# Altium PCB 0.96OLED_SSD1306.PcbDoc
Units mm, origin at the board's own origin, x right, y up, seen from the top; angles counter-clockwise.
Board outline 27 x 28 mm, 2 copper layers (Top Layer, Bottom Layer); 18 components, 15 nets, 67 pads, 13 vias.
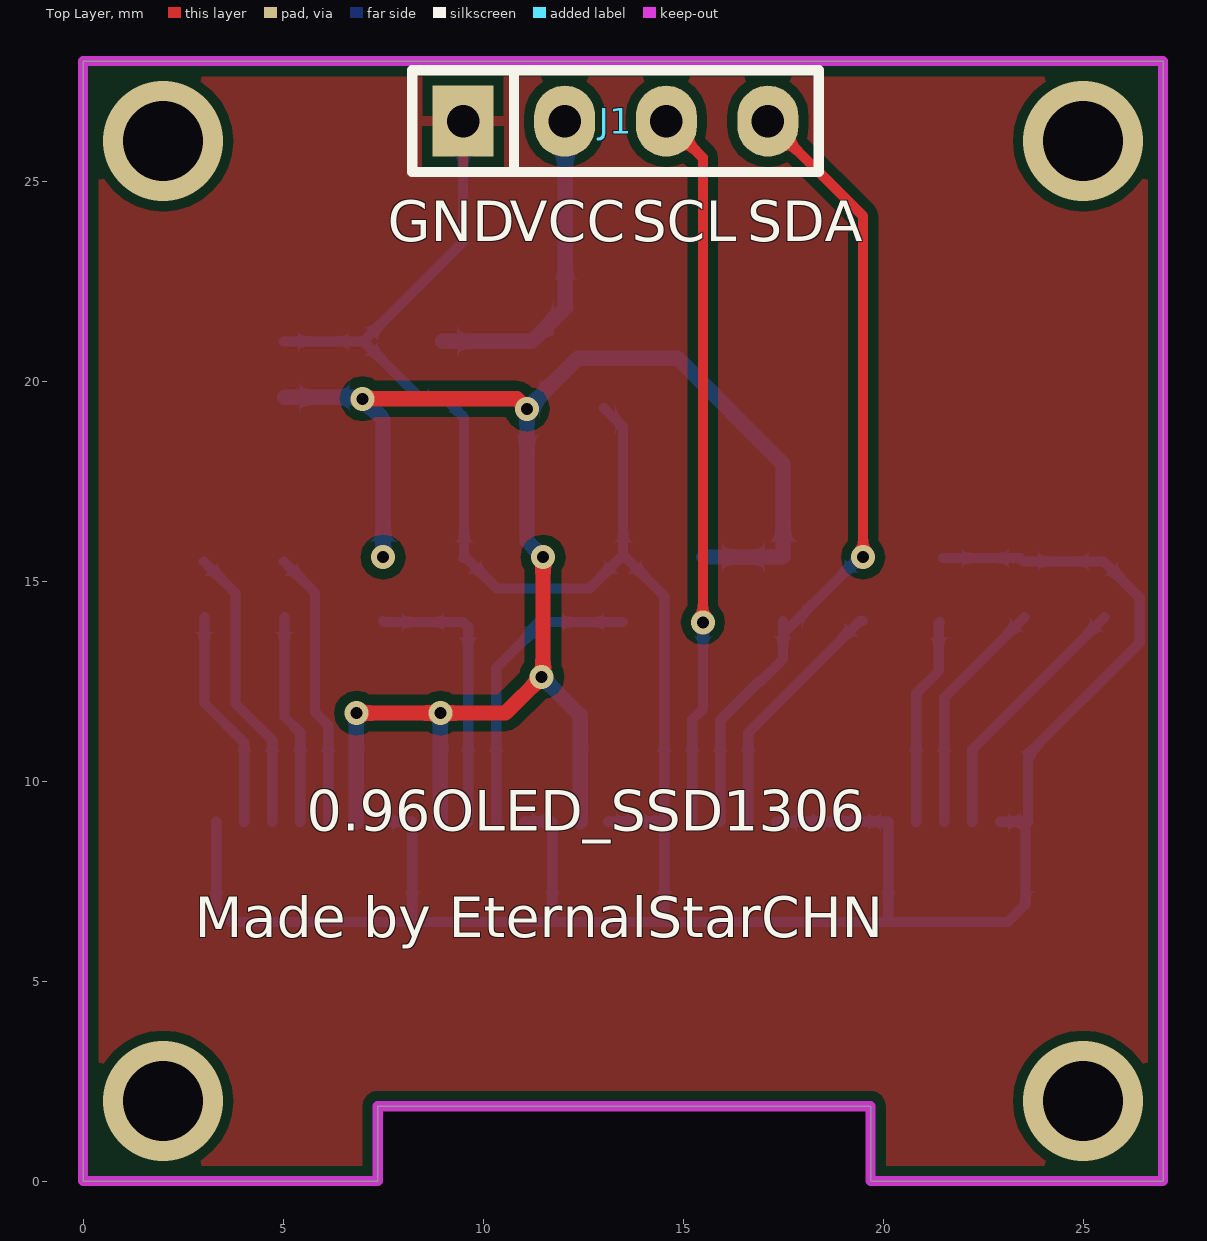
[diagram p0: Top Layer view]
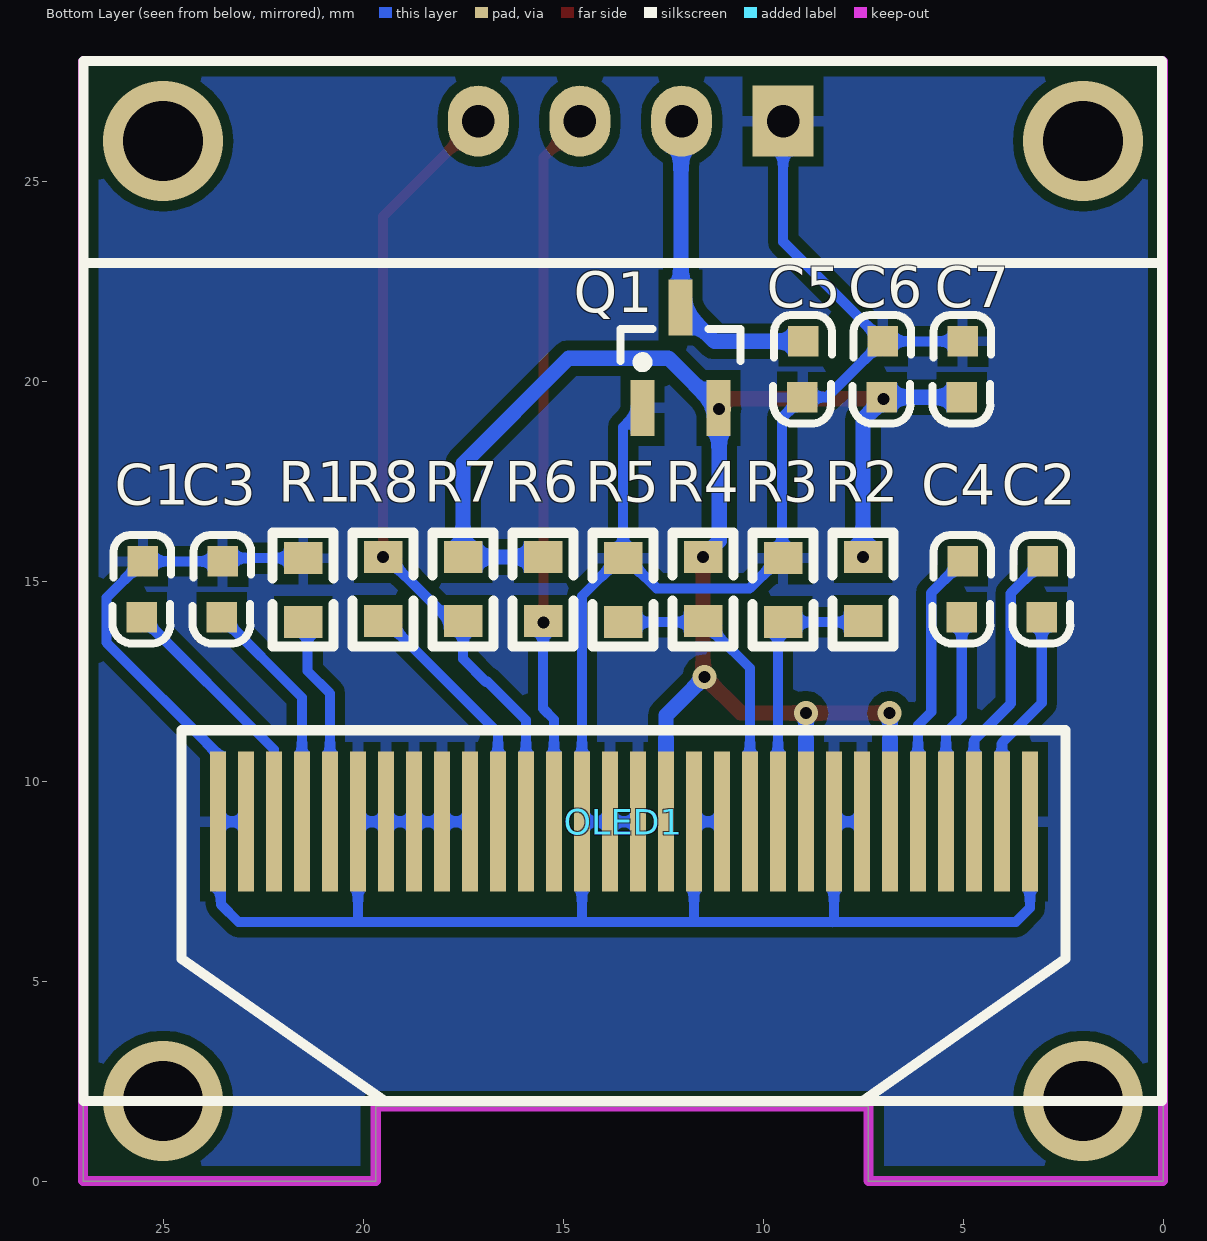
[diagram p1: Bottom Layer view, seen from below]
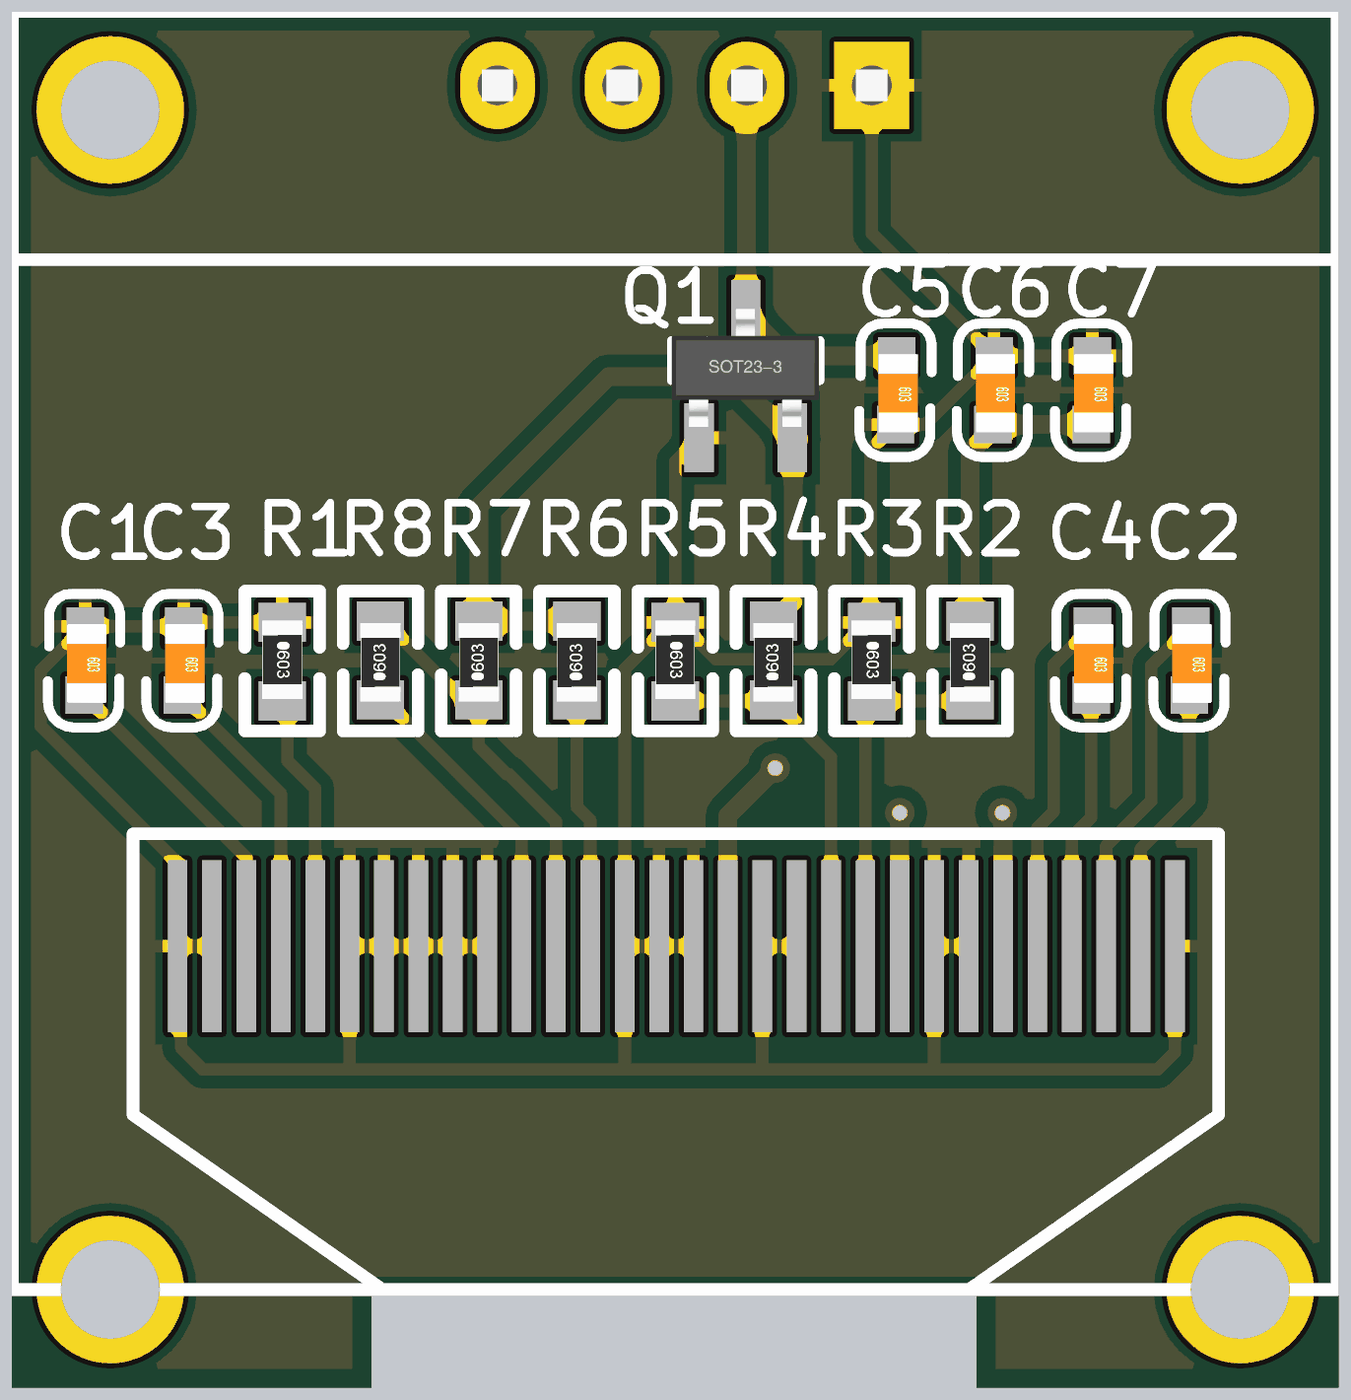
[diagram p2: 3D render of the assembled board from below, using the file's embedded part models]

## Layer stack, top to bottom
Top Solder: solder mask 0.0102, Solder Resist, Dk 3.5
Top Layer: signal copper 0.0356
Dielectric 1: dielectric 0.32, FR-4, Dk 4.8
Bottom Layer: signal copper 0.0356
Bottom Solder: solder mask 0.0102, Solder Resist, Dk 3.5

## Board outline
0,0 0,28 27,28 27,0 19.685,0 19.685,1.873 7.366,1.873 7.366,0

## Design rules (kind name [scope] priority, off if disabled: settings)
Clearance [All] p1: gap=0.254 ignorepadtopadclearanceinfootprint=FALSE except(0: Arc-Hole Track-Hole SMDPad-Hole THPad-Hole Via-Hole Fill-Hole Poly-Hole Region-Hole Text-Hole)
ComponentClearance ComponentClearance_1 [InComponent('OLED1')] p1: gap=0 collisioncheckmode=3 verticalgap=0 showdistances=FALSE
ComponentClearance [All] p2: gap=0.254 collisioncheckmode=3 verticalgap=0.254 showdistances=FALSE
MinimumSolderMaskSliver [All] p1: minsoldermaskwidth=0
PolygonConnect [All] p1: connectstyle=Relief reliefconductorwidth=0.254 reliefentries=4 polygonreliefangle="90 Angle" airgapwidth=0.254
RoutingVias [All] p1: holewidth=0.711 width=1.27 viastyle="Through Hole" minholewidth=0.3 minwidth=0.6 maxholewidth=6.3 maxwidth=6.3
SilkToSilkClearance [All] p1: silktosilkclearance=0
SilkToSolderMaskClearance [IsPad] p1: minsilkscreentomaskgap=0 clearancetoexposedcopper=TRUE
SolderMaskExpansion [All] p1: expansion=0.102
Width [All] p1: maxlimit=0.508 minlimit=0.127 preferedwidth=0.254
26 further rules are at their usual default settings.

## Components (designator, comment, footprint, x,y, rotation, side; value= is the part's Value field where it differs from the comment)
C1 "2.2uF/0603" 0603C 25.5,15.5 r270 bottom
C2 "1uF/0603" 0603C 3,15.5 r270 bottom
C3 "4.7uF/0603" 0603C 23.5,15.5 r270 bottom
C4 "1uF/0603" 0603C 5,15.5 r270 bottom
C5 "1uF/0603" 0603C 8.983,21 r270 bottom
C6 "1uF/0603" 0603C 7,21 r270 bottom
C7 "1uF/0603" 0603C 5,21 r270 bottom
J1 "Pin HDR1X4" "Pin HDR1X4/2.54mm-S" 9.5,26.5 r90 top
OLED1 "0.96OLED_SSD1306" OLED_0.96 3.329,8.985 r0 bottom locked
Q1 "662K/SOT23" SOT23 13.015,19.33 r180 bottom
R1 "910K/0603" 0603R 21.5,15.575 r270 bottom
R2 "1K/0603" 0603R 7.5,14 r90 bottom
R3 "1K/0603" 0603R 9.5,15.575 r270 bottom
R4 "1K/0603" 0603R 11.5,14 r90 bottom
R5 "1K/0603" 0603R 13.5,15.575 r270 bottom
R6 "4.7K/0603" 0603R 15.5,14 r90 bottom
R7 "4.7K/0603" 0603R 17.5,14 r90 bottom
R8 "0R/0603" 0603R 19.5,14 r90 bottom

## Footprints (in the part's own frame and the unit in brackets; to place one, negate y for a bottom-side part, rotate by r counter-clockwise, add the part's x,y. Pads: shape width x height; smd on the part's side, far side on the other; paste and mask are expansions set on the pad)
0603C [mil]
  rect 30x30 smd: 1(0.21,-0.35) 2(55.21,-1.35)
  silkscreen extent -26,-30 81,28, body extent -1,-15 62,16, height 12
0603R [mm]
  rect 0.8x0.965 smd: 1(0,0) 2(1.6,0)
  silkscreen extent -0.64,-0.76 2.21,0.76, body extent -0.04,-0.41 1.56,0.41, height 0.45
OLED_0.96 [mm]
  rect 0.4x3.5 smd: 1(0,0) 2(0.7,0) 3(1.4,0) 4(2.1,0) 5(2.8,0) 6(3.5,0) 7(4.2,0) 8(4.9,0) 9(5.6,0) 10(6.3,0) 11(7,0) 12(7.7,0) 13(8.4,0) 14(9.1,0) 15(9.8,0) 16(10.5,0) 17(11.2,0) 18(11.9,0) 19(12.6,0) 20(13.3,0) 21(14,0) 22(14.7,0) 23(15.4,0) 24(16.1,0) 25(16.8,0) 26(17.5,0) 27(18.2,0) 28(18.9,0) 29(19.6,0) 30(20.3,0)
  silkscreen extent -3.3,-19.01 23.66,6.98
"Pin HDR1X4/2.54mm-S" [mil]
  rect 70x60 hole 32: 1(0,0)
  oval 70x60 hole 32: 2(0,-100) 3(0,-200) 4(0,-300)
  silkscreen extent -50,-350 50,50, body extent -50,-350 50,50, height 336
SOT23 [mm]
  rect 0.6x1.4 smd: 1(0,0) 2(1.9,0) 3(0.95,2.514)
  silkscreen extent -0.55,1.02 2.45,1.97, body extent -0.56,0.22 2.44,2.62, height 1.05

## Part data
C1 C2 C3 C4 C5 C6 C7: library part CAP, "无极性电容"
Q1: library part LDO_SOT23, "SOT23封装LDO"
R1 R2 R3 R4 R5 R6 R7 R8: library part RES

## Via types
v1: diameter 0.6, hole 0.3, Top Layer to Bottom Layer, 9 vias
v2: diameter 3, hole 2, Top Layer to Bottom Layer, 4 vias

## Nets (pads, with @x,y where several pads share a name; then routed paths per layer and width w, separated by ;. In a path a pad name is that pad's centre, name@x,y a point inside that pad or via, vN(x,y) a via of type N, cw(c..) or ccw(c..) an arc to the next point about the centre after c; other vN are vias at no path point)
GND: C1.1 C3.1 C5.2 C6.1 C7.1 J1.1 OLED1.1 OLED1.7 OLED1.8 OLED1.12 OLED1.13 OLED1.15 OLED1.16 OLED1.17 OLED1.21 OLED1.22 OLED1.23 OLED1.24 OLED1.25 OLED1.29 OLED1.30 Q1.1 R1.1 R3.1 R5.1 | length 84.3
  Bottom Layer w0.254: OLED1.1 3.329,6.831 3.683,6.477 8.255,6.477 ; C7.1 C6.1 ; OLED1.7 OLED1.8 8.229,6.503 8.255,6.477 ; J1.1 9.5,23.486 C6.1 ; OLED1.12 OLED1.13 11.729,6.522 11.684,6.477 ; Q1.1 13.5,18.845 R5.1 ; OLED1.15 OLED1.16 OLED1.17 ; OLED1.21 OLED1.22 OLED1.23 OLED1.24 OLED1.25 20.129,6.54 20.066,6.477 ; R1.1 23.429,15.575 C3.1 C1.1 26.416,14.588 26.416,13.462 23.622,10.668 23.622,8.992 OLED1.30 ; OLED1.29 OLED1.30 ; C6.1 8.406,19.598 C5.2 9.525,19.09 9.525,15.6 R3.1 9.582,15.575 10.338,14.819 12.662,14.819 13.418,15.575 R5.1 ; 8.255,6.477 11.684,6.477 ; 11.684,6.477 14.605,6.477 ; R5.1 13.583,15.575 14.529,14.629 OLED1.17 ; OLED1.17 14.529,6.553 14.605,6.477 ; 14.605,6.477 20.066,6.477 ; 20.066,6.477 23.114,6.477 23.556,6.919 23.556,8.912 OLED1.30
NetC1_2: C1.2 OLED1.28 | length 6.5
  Bottom Layer w0.254: OLED1.28 22.229,10.792 C1.2
NetC2_1: C2.1 OLED1.3 | length 7.2
  Bottom Layer w0.254: C2.1 3.81,14.694 3.81,11.938 4.729,11.019 OLED1.3
NetC2_2: C2.2 OLED1.2 | length 5.5
  Bottom Layer w0.254: C2.2 3.034,11.952 4.029,10.957 OLED1.2
NetC3_2: C3.2 OLED1.27 | length 5.9
  Bottom Layer w0.254: OLED1.27 21.529,12.092 C3.2
NetC4_1: C4.1 OLED1.5 | length 7
  Bottom Layer w0.254: C4.1 5.796,14.707 5.796,11.73 6.129,11.397 OLED1.5
NetC4_2: C4.2 OLED1.4 | length 5.3
  Bottom Layer w0.254: C4.2 5.034,11.603 5.429,11.208 OLED1.4
NetOLED1_10: OLED1.10 R2.1 R3.2 | length 7.1
  Bottom Layer w0.254: R2.1 7.525,13.975 R3.2 9.629,13.846 OLED1.10
NetOLED1_11: OLED1.11 R4.1 R5.2 | length 7.6
  Bottom Layer w0.254: OLED1.11 10.329,12.829 11.145,13.645 11.145,13.727 11.418,14 R4.1 11.525,13.975 R5.2
NetOLED1_20: OLED1.20 R8.1 | length 6.3
  Bottom Layer w0.254: OLED1.20 16.629,11.212 19.417,14 R8.1
NetOLED1_26: OLED1.26 R1.2 | length 5.2
  Bottom Layer w0.254: OLED1.26 20.829,12.193 21.39,12.754 21.39,13.948 R1.2@21.418,13.975
SCL(D0): J1.3 OLED1.18 R6.1 | length 18
  Top Layer w0.254: J1.3 15.494,25.586 v1(15.494,13.97)
  Bottom Layer w0.254: OLED1.18 15.229,11.542 15.5,11.813 R6.1
SDA(D1): J1.4 OLED1.19 R7.1 R8.2 | length 20.4
  Top Layer w0.254: J1.4 19.5,24.12 v1(19.5,15.6)
  Bottom Layer w0.254: OLED1.19 15.929,11.523 16.891,12.485 16.93,12.485 17.5,13.055 R7.1@17.5,13.683 ; R7.1 R7.1@17.5,13.683 ; v1(19.5,15.6) 19.459,15.6 19.438,15.621 R7.1@17.5,13.683
VCC: C6.2 C7.2 OLED1.6 OLED1.9 OLED1.14 Q1.2 R2.2 R4.2 R6.2 R7.2 | length 44
  Top Layer w0.381: v1(6.84,11.7) v1(8.929,11.7) 10.557,11.7 v1(11.465,12.608) 11.5,12.643 v1(11.5,15.6) ; v1(6.985,19.558) 10.845,19.558 v1(11.099,19.304)
  Bottom Layer w0.254: v1(6.84,11.7) v1@6.84,11.702
  Bottom Layer w0.381: C7.2 C6.2 ; OLED1.6 v1@6.829,11.7 ; v1(6.985,19.558) 7.5,19.043 v1(7.5,15.6) ; OLED1.9 v1@8.929,11.645 ; v1(11.465,12.608) 12.429,11.644 OLED1.14 ; v1(11.5,15.6) 11.099,16.001 v1(11.099,19.304) 12.369,20.574 14.859,20.574 17.5,17.933 R7.2 R6.2@15.515,15.6
VCC_IN: C5.1 J1.2 Q1.3 | length 8.1
  Bottom Layer w0.381: C5.1 11.216,20.995 Q1.3 12.053,21.856 12.053,26.487 J1.2
copper on no net:
  other v2: 2,2 25,2 2,26 25,26

## Polygon pours and split planes (outlines as drawn)
GND on Top Layer "Top Layer-No Net" (solid, pour order 0): 0,0 0,28 27,28 27,0 19.685,0 19.685,1.873 7.366,1.873 7.366,0
GND on Bottom Layer "Top Layer-No Net1" (solid, pour order 1): 0,0 0,28 27,28 27,0 19.685,0 19.685,1.873 7.366,1.873 7.366,0

## Keep-outs
Keep-Out Layer:
  the board outline again, w0.254

## Silkscreen, mask and mechanical layers (free items; w line width, h text height)
Top Overlay:
  text "GND" at 7.62,23.5 h1.02
  text "VCC" at 10.668,23.5 h1.02
  text "SCL" at 13.716,23.5 h1.02
  text "SDA" at 16.6,23.5 h1.02
  text "0.96OLED_SSD1306" at 5.588,8.763 h1.02
  text "Made by EternalStarCHN" at 2.794,6.096 h1.02